# Altium PCB Arduino_DUE_V02b.PcbDoc (part 1 of 3)
Units mm, origin at the board's own origin, x right, y up, seen from the top; angles counter-clockwise.
Board outline 112.18 x 53.64 mm, 4 copper layers (Top Layer, Mid-Layer 1, Mid-Layer 2, Bottom Layer); 129 components, 175 nets, 644 pads, 366 vias.
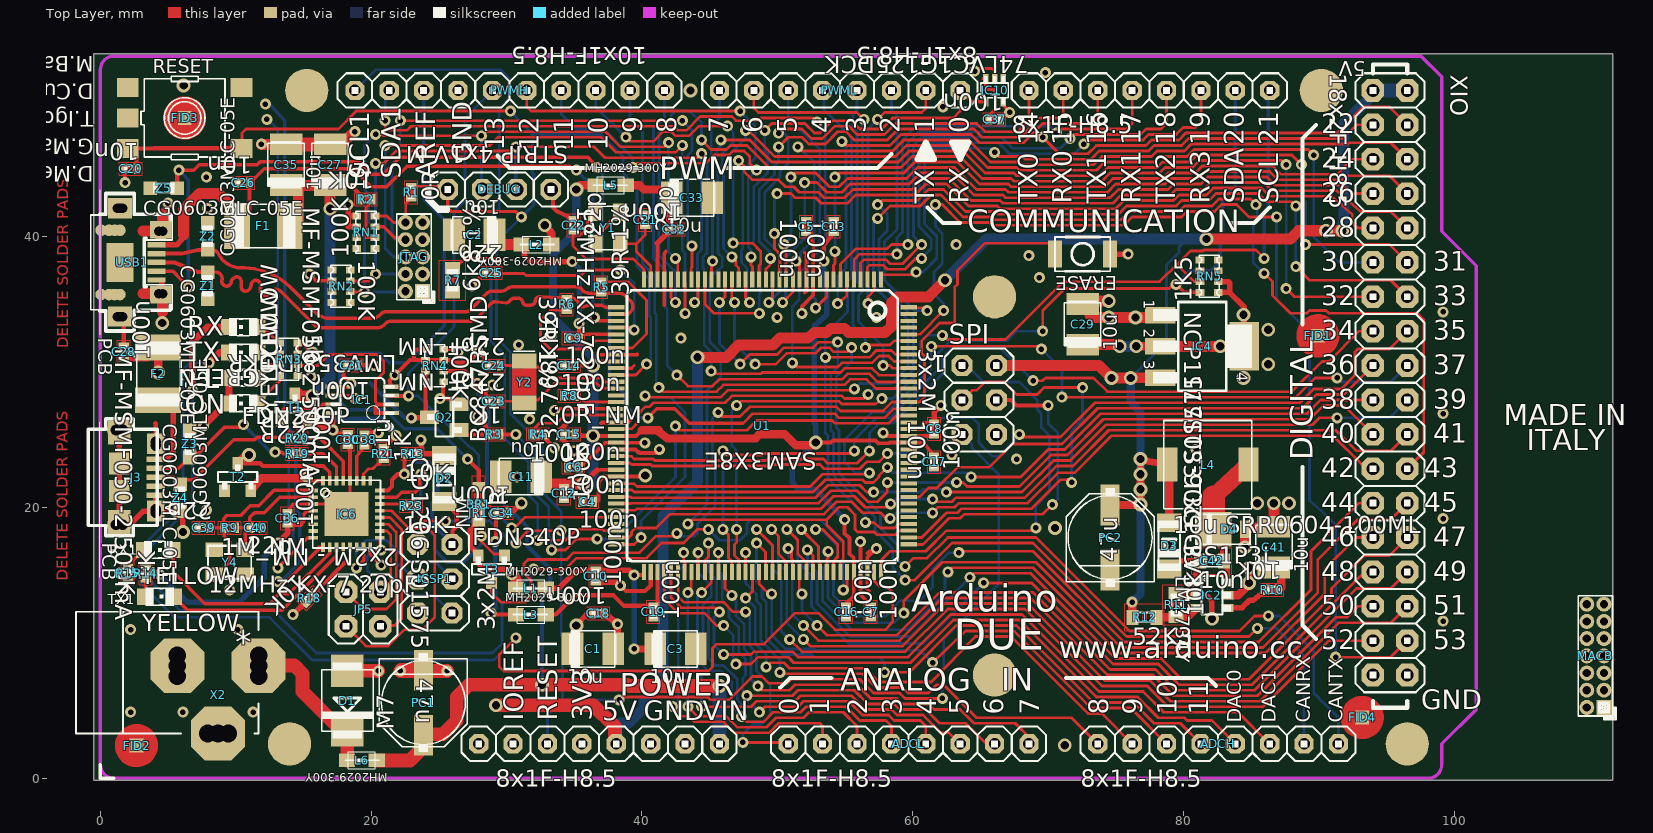
[diagram p0: Top Layer view]
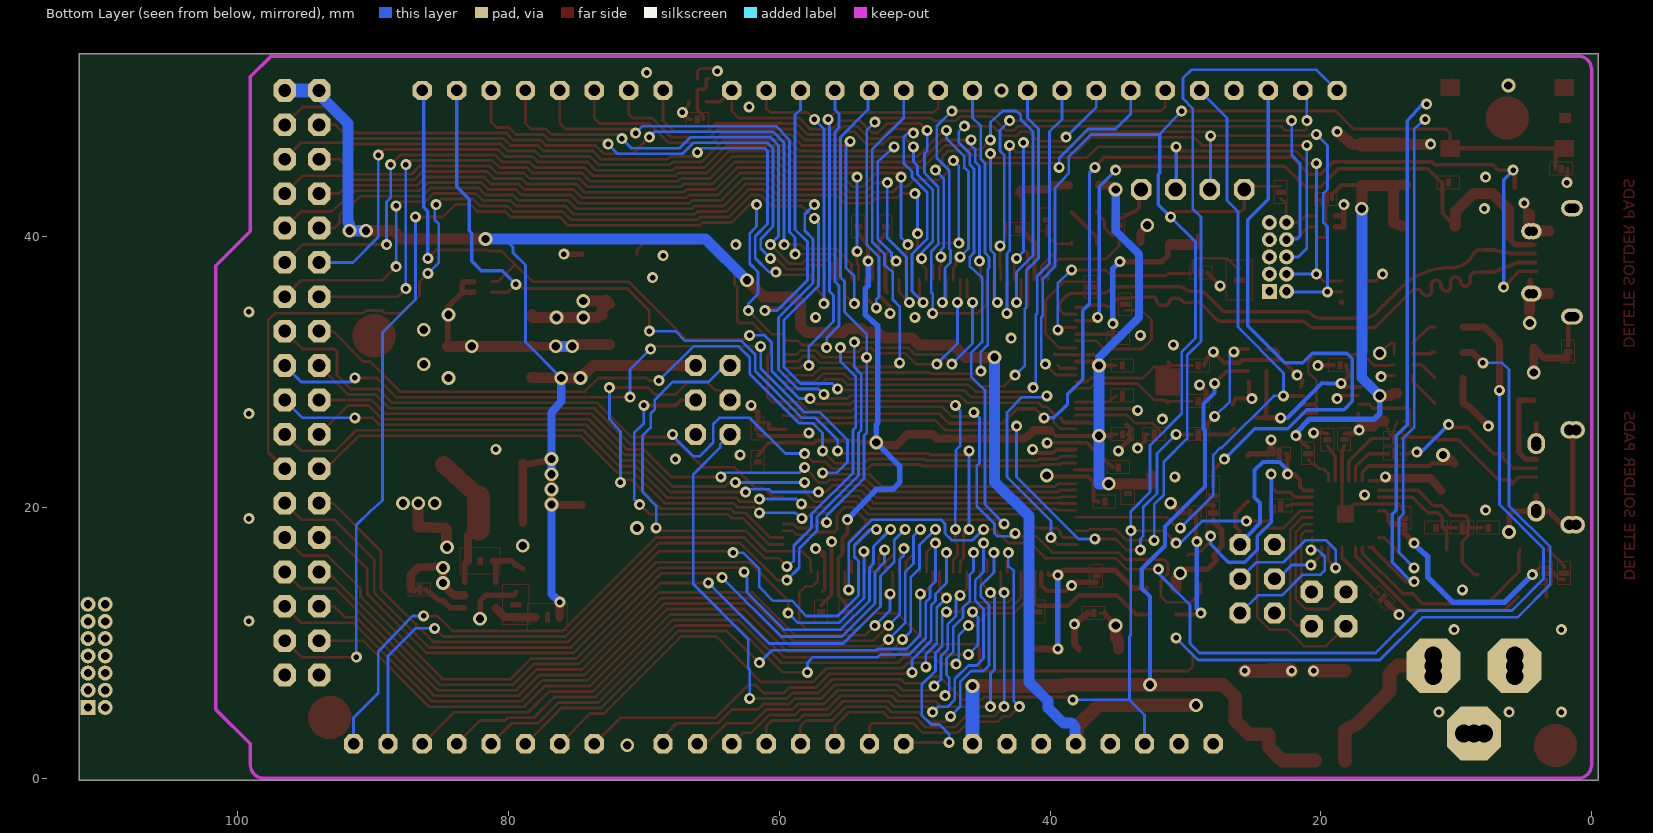
[diagram p1: Bottom Layer view, seen from below]
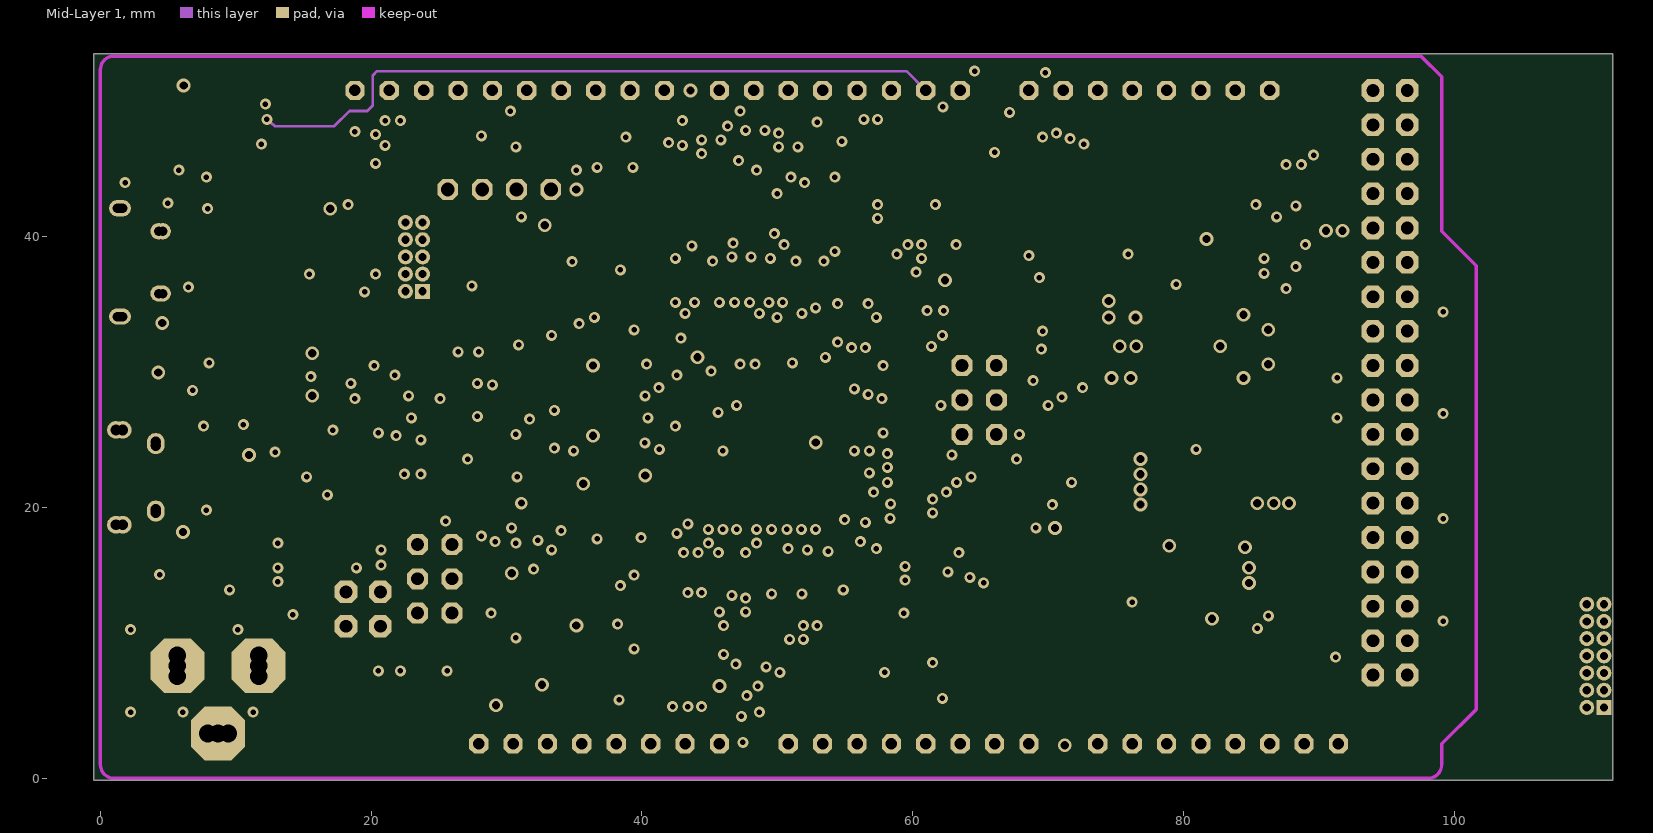
[diagram p2: Mid-Layer 1]
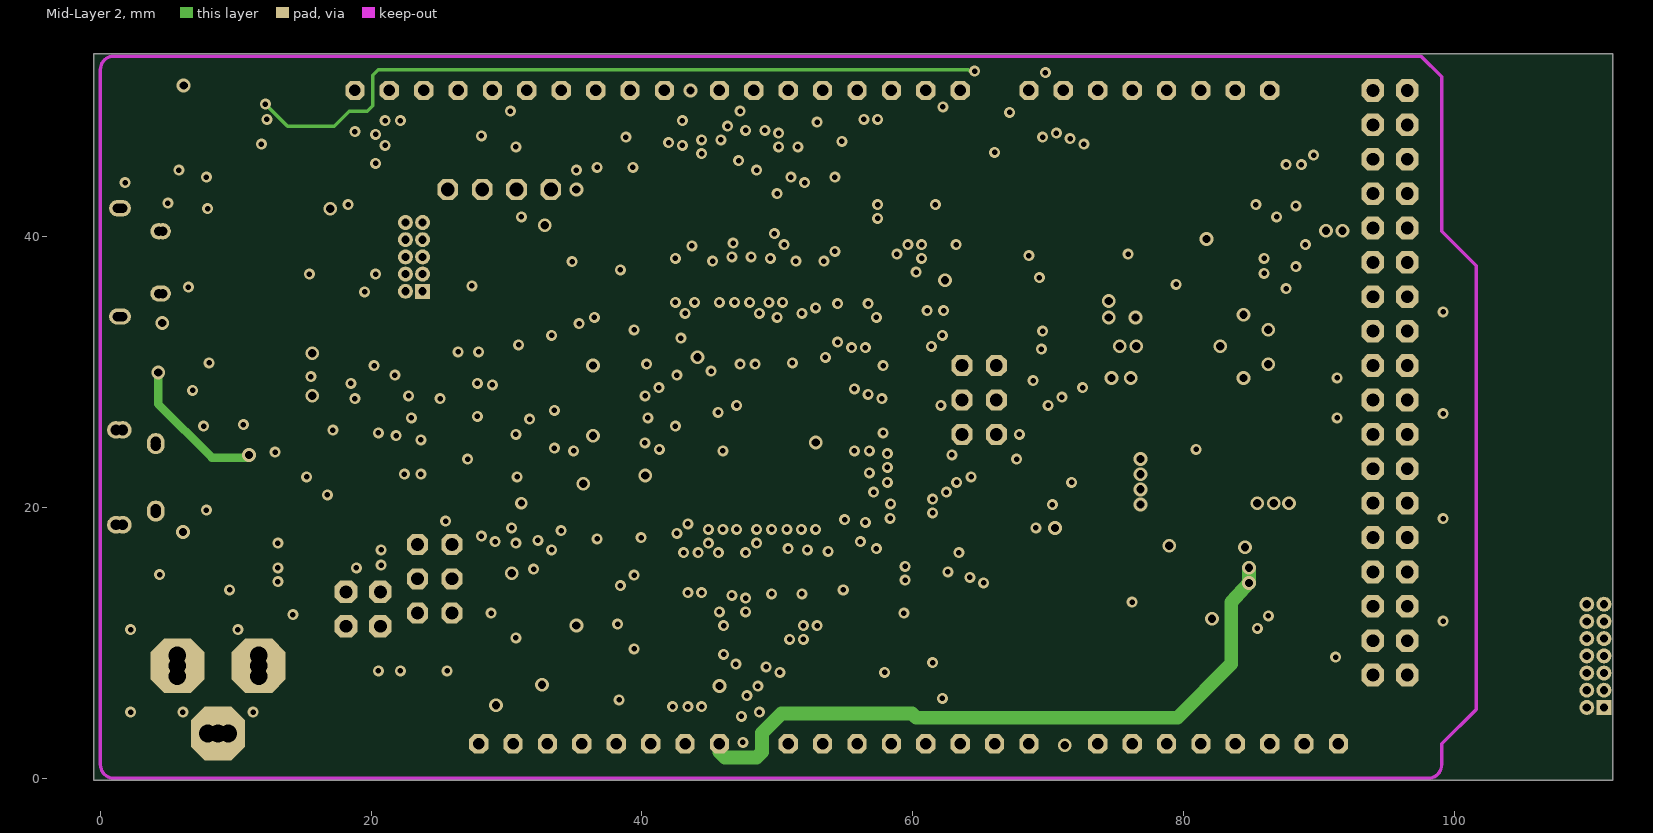
[diagram p3: Mid-Layer 2]

## Layer stack, top to bottom
Top Solder: solder mask 0.0102, Solder Resist, Dk 3.5
Top Layer: signal copper 0.0356
Dielectric1: core 0.32, FR-4, Dk 4.8
Mid-Layer 1: signal copper 0.0356
Dielectric2: prepreg 0.32, FR-4, Dk 4.8
Mid-Layer 2: signal copper 0.0356
Dielectric3: core 0.32, FR-4, Dk 4.8
Bottom Layer: signal copper 0.0356
Bottom Solder: solder mask 0.0102, Solder Resist, Dk 3.5

## Board outline
-0.479,-0.152 111.704,-0.152 111.704,53.492 -0.479,53.492

## Design rules (kind name [scope] priority, off if disabled: settings)
AssemblyTestPointUsage [All] p1 off:
AssemblyTestpoint [All] p1 off: testpointundercomponent=TRUE minsize=1.016 maxsize=2.54 preferedsize=1.524 minholesize=0 maxholesize=1.016 preferedholesize=0.813 testpointgrid=0.025 usegrid=TRUE gridtolerance=0 allowsidetop=TRUE allowsidebottom=TRUE
Clearance [All] p1: gap=0.102 ignorepadtopadclearanceinfootprint=FALSE except(0: Arc-Hole Track-Hole SMDPad-Hole THPad-Hole Via-Hole Fill-Hole Poly-Hole Region-Hole Text-Hole)
PolygonConnect [All] p1: connectstyle=Relief reliefconductorwidth=0.254 reliefentries=4 polygonreliefangle="90 Angle" airgapwidth=0.254
RoutingVias [All] p1: holewidth=0.711 width=1.27 viastyle="Through Hole" minholewidth=0.711 minwidth=1.27 maxholewidth=0.711 maxwidth=1.27
SolderMaskExpansion [All] p1: expansion=0.102
Width [All] p1: maxlimit=0.254 minlimit=0.254 preferedwidth=0.254
28 further rules are at their usual default settings.

## Components (designator, comment, footprint, x,y, rotation, side; value= is the part's Value field where it differs from the comment)
ADCH "8x1F-H8.5" 1X08 82.55,2.54 r0 top locked
ADCL "8x1F-H8.5" 1X08 59.69,2.54 r0 top locked
BR1 "NM" J0402 27.94,20.879 r270 top
C1 "10u" SMC_B 36.373,9.55 r0 top
C2 "10u" SMC_B 27.61,40.132 r180 top
C3 "10u" SMC_B 42.469,9.55 r0 top
C4 "100n" C0402 35.966,20.422 r0 top
C5 "100n" C0402 52.121,40.742 r270 top
C6 "100n" C0402 34.95,22.962 r0 top
C7 "100n" C0402 56.896,12.294 r90 top
C8 "100n" C0402 61.57,25.806 r270 top
C9 "100n" C0402 34.95,32.512 r0 top
C10 "100n" C0402 36.576,14.935 r90 top
C11 "10u" SMC_B 31.064,22.276 r180 top
C12 "100n" C0402 34.239,21.031 r90 top
C13 "100n" C0402 54.153,40.742 r270 top
C14 "100n" C0402 34.646,30.48 r0 top
C15 "100n" C0402 34.646,25.4 r0 top
C16 "100n" C0402 55.067,12.294 r90 top
C17 "100n" C0402 61.57,23.368 r90 top
C18 "100n" C0402 36.779,12.192 r180 top
C19 "100n" C0402 40.843,12.294 r90 top
C20 "10n" C0402 2.235,45.009 r180 top
C21 "22p" C0402 40.234,41.25 r90 top
C22 "22p" C0402 34.95,40.843 r90 top
C23 "22pF_NM" C0402 29.058,27.838 r180 top
C24 "22pF_NM" C0402 29.058,30.48 r180 top
C25 "22p" C0402 28.854,37.338 r180 top
C26 "10n" C0402 10.566,43.993 r180 top
C27 "10u" SMC_B 16.967,45.314 r90 top
C28 "100n" C0402 1.727,31.496 r90 top
C29 "10u" SMC_B 72.542,33.528 r90 top
C30 "100n" C0402 18.263,25.019 r90 top
C31 "100n" C0402 18.567,30.505 r180 top
C32 "100n" C0402 42.367,40.538 r180 top
C33 "10u" SMC_B 43.688,42.875 r0 top
C34 "100n" C0402 29.667,19.609 r180 top
C35 "10u" SMC_B 13.716,45.314 r90 top
C36 "100n" C0402 13.818,19.202 r90 top
C37 "100n" C0402 66.04,48.666 r180 top
C38 "1u" C0402 19.507,24.994 r90 top
C39 "22p" C0402 7.62,18.491 r180 top
C40 "22p" C0402 11.481,18.491 r0 top
C41 "10u" SMC_B 86.665,17.069 r90 top
C42 "10n" C0603-ROUND 82.093,16.053 r0 top
COMMUNICATION "8x1F-H8.5" 1X08 77.47,50.8 r0 top locked
D1 "M7" SMB 18.237,5.74 r90 top
D2 "CD1206-S01575" MINIMELF 25.4,22.149 r270 top
D3 "CD1206-S01575" MINIMELF 78.943,17.17 r90 top
D4 "SS1P3L" DO220AAL 82.906,18.39 r0 top
DEBUG "STRIP 4x1V M" 1X04 29.464,43.485 r180 top
ERASE "" SMD_157SW 72.542,38.71 r180 top
F1 "MF-MSMF050-2 500mA" L1812 12.04,40.792 r180 top
F2 "MF-MSMF050-2 500mA" L1812 4.267,29.87 r270 top
FID1 "*" FIDUCIA-MOUNT 89.916,32.68 r0 top
FID2 "*" FIDUCIA-MOUNT 2.667,2.413 r0 top
FID3 "*" FIDUCIA-MOUNT 6.223,48.768 r0 top
FID4 "*" FIDUCIA-MOUNT 93.193,4.496 r0 top
IC1 "LMV358IDGKR" MSOP08 19.355,27.94 r90 top
IC2 "LM2734Y" SOT23-6 82.093,13.513 r270 top
IC4 "NCP1117ST33T3G -3V3" SOT223 81.382,31.902 r270 top
IC6 "ATMEGA16U2-MU" MLF32 18.186,19.507 r0 top
IC10 "74LVC1G125DCK" SC70-5 66.04,50.8 r180 top
ICSP1 "3x2M" 2X03 24.689,14.732 r90 top
J3 "USB-MICRO B" CON2_USB_MICRO_B_AT 1.397,22.225 r270 top
JP5 "2x2M - NM" 2X02 19.406,12.497 r180 top
JR1 "0R" R0402 27.94,19.609 r90 top
JTAG "*" PINHEAD_2X05_127 23.165,38.506 r180 top
L "YELLOW" CHIP-LED0805 10.541,29.566 r90 top
L1 "MH2029-300Y" 0805 31.801,14.021 r0 top
L2 "MH2029-300Y" 0805 32.207,39.421 r180 top
L3 "MH2029-300Y" 0805 31.801,12.09 r0 top
L4 "10u SRR0604-100ML" SRR0604 81.788,23.165 r0 top
L5 "MH2029-300Y" 0805 37.694,43.79 r0 top
L6 "MH2029-300Y" 0805 19.304,1.321 r180 top
MACB "Eth" PINHEAD_2X07_127 110.414,9.042 r180 top
ON "GREEN" CHIP-LED0805 10.541,27.686 r90 top
PC1 "47u" PANASONIC_D 23.851,5.588 r270 top
PC2 "47u" PANASONIC_D 74.574,17.78 r90 top
POWER "8x1F-H8.5" 1X08 36.83,2.54 r0 top locked
PWMH "10x1F-H8.5" 1X10 30.226,50.8 r180 top locked
PWML "8x1F-H8.5" 1X08 54.61,50.8 r180 top locked
Q2 "BC847BSMD" SOT23 25.4,26.67 r90 top
R1 "0R" R0402 22.962,43.282 r90 top
R2 "10K" R0402 19.609,42.774 r180 top
R3 "1K" R0402 29.058,25.4 r180 top
R4 "100K" R0402 32.309,25.4 r0 top
R5 "39R 1%" R0402 36.982,36.271 r90 top
R6 "39R 1%" R0402 34.442,35.001 r270 top
R7 "6k8 1%" R0603-ROUND 26.01,36.779 r90 top
R8 "0R_NM" R0402 34.646,28.245 r0 top
R9 "1M_NM" R0402 9.55,18.491 r0 top
R10 "10k" R0402 86.563,13.919 r180 top
R11 "10K" R0603-ROUND 79.451,12.802 r90 top
R12 "52K3" R0603-ROUND 77.114,11.887 r0 top
R13 "10K" R0402 23.063,23.978 r0 top
R14 "1K" R0402 3.353,15.138 r270 top
R15 "1K" R0402 2.032,15.138 r90 top
R18 "10K" R0402 15.443,13.31 r225 top
R19 "22R" R0402 14.529,23.978 r180 top
R20 "22R" R0402 14.529,25.095 r180 top
R21 "1K" R0402 20.93,23.978 r90 top
R23 "10K" R0402 22.962,20.117 r0 top
RESET "TS42" TS42 6.223,48.768 r0 top
RN1 "100K" CAT16 19.609,40.335 r90 top
RN2 "100K" CAT16 17.78,36.347 r270 top
RN3 "1k" CAY16 13.894,30.937 r270 top
RN4 "100K" CAT16 24.689,30.48 r270 top
RN5 "1K5" CAT16 81.89,37.084 r90 top
RX "YELLOW" CHIP-LED0805 10.541,33.325 r90 top
RX1 "YELLOW" CHIP-LED0805 4.267,16.866 r270 top
SPI "3x2M" 2X03 64.897,27.94 r270 top locked
T1 "FDN340P" SOT-23 14.376,27.407 r180 top
T2 "FDN340P" SOT-23 10.16,22.25 r180 top
T3 "FDN340P" SOT-23 28.854,15.443 r0 top
TX "YELLOW" CHIP-LED0805 10.541,31.445 r90 top
TX1 "YELLOW" CHIP-LED0805 4.369,13.411 r270 top
U1 "SAM3X8E" LQFP144 48.895,26.035 r180 top
USB1 "MICRO-USB-AB1" MCR-AB1-S-RA-SMT 1.448,38.1 r270 top
X2 "*" POWERSUPPLY_DC-21MM 5.334,8.382 r90 top
XIO "18x2F-H8.5" 2X18 95.25,29.21 r270 top locked
Y1 "12MHz KX-7 20pF" CRYSTAL-3.2-2.5 37.465,40.64 r270 top
Y2 "32.768Khz" RESONATOR_EPSON_FC_145 31.293,29.261 r90 top
Y4 "12MHz KX-7 20pF" CRYSTAL-3.2-2.5 9.55,15.951 r0 top
Z1 "CG0603MLC-05E" CT/CN0603 7.925,36.373 r270 top
Z2 "CG0603MLC-05E" CT/CN0603 7.925,40.03 r90 top
Z3 "CG0603MLC-05E" CT/CN0603 6.604,24.689 r270 top
Z4 "CG0603MLC-05E" CT/CN0603 5.893,20.726 r90 top
Z5 "CG0603MLC-05E" CT/CN0603 4.674,43.586 r0 top

## Footprints (in the part's own frame and the unit in brackets; to place one, negate y for a bottom-side part, rotate by r counter-clockwise, add the part's x,y. Pads: shape width x height; smd on the part's side, far side on the other; paste and mask are expansions set on the pad)
1X04 [mil]
  oct 60x60 hole 40: 1(-150,0) 2(-50,0) 3(50,0) 4(150,0)
  silkscreen extent -200,-50 200,50
1X08 [mil]
  oct 56x56 hole 33.46: 1(-350,0) 2(-250,0) 3(-150,0) 4(-50,0) 5(50,0) 6(150,0) 7(250,0) 8(350,0)
  silkscreen extent -400,-50 400,50
1X10 [mil]
  oct 56x56 hole 33.46: 1(-450,0) 2(-350,0) 3(-250,0) 4(-150,0) 5(-50,0) 6(50,0) 7(150,0) 8(250,0) 9(350,0) 10(450,0)
  silkscreen extent -500,-50 500,50
2X02 [mil]
  oct 66x66 hole 37.4: 1(-50,-50) 2(-50,50) 3(50,-50) 4(50,50)
  silkscreen extent -100,-100 100,100
2X03 [mm]
  oct 1.55x1.55 hole 0.95: 1(-2.54,-1.27) 2(-2.54,1.27) 3(0,-1.27) 4(0,1.27) 5(2.54,-1.27) 6(2.54,1.27)
  silkscreen extent -3.81,-2.54 3.81,2.54
2X18 [mil]
  oct 66x66 hole 37.4: 1(-850,-50) 2(-850,50) 3(-750,-50) 4(-750,50) 5(-650,-50) 6(-650,50) 7(-550,-50) 8(-550,50) 9(-450,-50) 10(-450,50) 11(-350,-50) 12(-350,50) 13(-250,-50) 14(-250,50) 15(-150,-50) 16(-150,50) 17(-50,-50) 18(-50,50) 19(50,-50) 20(50,50) 21(150,-50) 22(150,50) 23(250,-50) 24(250,50) 25(350,-50) 26(350,50) 27(450,-50) 28(450,50) 29(550,-50) 30(550,50) 31(650,-50) 32(650,50) 33(750,-50) 34(750,50) 35(850,-50) 36(850,50)
  silkscreen extent -900,-100 900,100
0805 [mm]
  rect 1.2x1 smd: 1(-1.1,0) 2(1.1,0)
  silkscreen extent -1.3,-0.63 1.2,0.63
C0402 [mil]
  rect 20x30 smd: 1(-17.5,0) 2(17.5,0)
  Top Layer region: -7.87,-11.81 7.87,-11.81 7.87,11.81 -7.87,11.81
  Top Layer lines w2: -32.99,-19.02 -32.99,19.02 32.99,19.02 32.99,-19.02 -32.99,-19.02
  silkscreen extent -20,-10 20,10
C0603-ROUND [mm]
  rect 0.898x1.1 smd: 1(-0.889,0) 2(0.889,0)
  Top Layer region: -0.2,-0.3 0.2,-0.3 0.2,0.3 -0.2,0.3
  Top Layer lines w0.051: -1.473,-0.983 -1.473,0.983 1.473,0.983 1.473,-0.983 -1.473,-0.983
  silkscreen extent -0.84,-0.47 0.83,0.48
CAT16 [mm]
  rect 0.5x0.65 smd: 1(-1.2,-0.675) 2(-0.4,-0.675) 3(0.4,-0.675) 4(1.2,-0.675) 5(1.2,0.675) 6(0.4,0.675) 7(-0.4,0.675) 8(-1.2,0.675)
  silkscreen extent -1.55,-0.75 1.55,0.75
CAY16 [mm]
  rect 0.5x0.65 smd: 1(-1.2,-0.675) 2(-0.4,-0.675) 3(0.4,-0.675) 4(1.2,-0.675) 5(1.2,0.675) 6(0.4,0.675) 7(-0.4,0.675) 8(-1.2,0.675)
  silkscreen extent -1.55,-0.75 1.55,0.75
CHIP-LED0805 [mm]
  rect 1.2x1.2 smd: A(0,-1.05) C(0,1.05)
  silkscreen extent -0.68,-1.05 0.68,1.05
CON2_USB_MICRO_B_AT [mil]
  rect 16x53 smd: P1(-52,106) P2(-26,106) P3(0,106) P4(26,106) P5(52,106)
  round 51.5 hole 31.5: P$1(-103,106) P$2(-93,106) P$3(-138,-10) P$4(-138,10) P$5(138,10) P$6(138,-10) P$7(93,106) P$8(103,106)
  rect 70x65 smd: S1(-130,0) S2(130,0)
  rect 60x50 smd: S3(-98,106) S4(98,106)
  rect 64x60 smd: S5(-40,0) S6(40,0)
  silkscreen extent -170,-90 290,110
CRYSTAL-3.2-2.5 [mm]
  rect 1.3x1.05 smd: 1(-1.15,-0.925) 2(1.15,-0.925) 3(1.15,0.925) 4(-1.15,0.925)
  silkscreen extent -1.6,-1.25 1.6,1.25
CT/CN0603 [mm]
  rect 1x1 smd: 1(-1,0) 2(1,0)
  silkscreen extent -0.75,-0.35 0.75,0.35
DO220AAL [mil]
  rect 105x100 smd: P$1(-27.56,0)
  rect 30x50 smd: P$2(64.96,0)
  silkscreen extent -79,-43 79,43
FIDUCIA-MOUNT [mil]
  rect 40x40 smd: P$1(0,0)
  Top Layer circle w5: c0,0 r59.06
  Top Layer circle w86: c0,0 r19.68
J0402 [mm]
  rect 0.7x0.9 smd: 1(-0.65,0) 2(0.65,0) 3(1.95,0)
  Top Layer region: 1.1,-0.4 1.5,-0.4 1.5,0.4 1.1,0.4
  Top Layer region: -0.2,-0.4 0.2,-0.4 0.2,0.4 -0.2,0.4
  Top Layer lines w0.051: 2.773,-0.483 -1.473,-0.483 -1.473,0.483 2.773,0.483 2.773,-0.483
  silkscreen extent 0.72,-0.3 1.83,0.29
L1812 [mm]
  rect 1.9x3.4 smd: 1(-1.95,0) 2(1.95,0)
  silkscreen extent -2.39,-1.65 2.4,1.65
LQFP144 [mm]
  rect 0.3x1.2 smd: 1(-8.75,-10.8) 2(-8.25,-10.8) 3(-7.75,-10.8) 4(-7.25,-10.8) 5(-6.75,-10.8) 6(-6.25,-10.8) 7(-5.75,-10.8) 8(-5.25,-10.8) 9(-4.75,-10.8) 10(-4.25,-10.8) 11(-3.75,-10.8) 12(-3.25,-10.8) 13(-2.75,-10.8) 14(-2.25,-10.8) 15(-1.75,-10.8) 16(-1.25,-10.8) 17(-0.75,-10.8) 18(-0.25,-10.8) 19(0.25,-10.8) 20(0.75,-10.8) 21(1.25,-10.8) 22(1.75,-10.8) 23(2.25,-10.8) 24(2.75,-10.8) 25(3.25,-10.8) 26(3.75,-10.8) 27(4.25,-10.8) 28(4.75,-10.8) 29(5.25,-10.8) 30(5.75,-10.8) 31(6.25,-10.8) 32(6.75,-10.8) 33(7.25,-10.8) 34(7.75,-10.8) 35(8.25,-10.8) 36(8.75,-10.8) 73(8.75,10.8) 74(8.25,10.8) 75(7.75,10.8) 76(7.25,10.8) 77(6.75,10.8) 78(6.25,10.8) 79(5.75,10.8) 80(5.25,10.8) 81(4.75,10.8) 82(4.25,10.8) 83(3.75,10.8) 84(3.25,10.8) 85(2.75,10.8) 86(2.25,10.8) 87(1.75,10.8) 88(1.25,10.8) 89(0.75,10.8) 90(0.25,10.8) 91(-0.25,10.8) 92(-0.75,10.8) 93(-1.25,10.8) 94(-1.75,10.8) 95(-2.25,10.8) 96(-2.75,10.8) 97(-3.25,10.8) 98(-3.75,10.8) 99(-4.25,10.8) 100(-4.75,10.8) 101(-5.25,10.8) 102(-5.75,10.8) 103(-6.25,10.8) 104(-6.75,10.8) 105(-7.25,10.8) 106(-7.75,10.8) 107(-8.25,10.8) 108(-8.75,10.8)
  rect 1.2x0.3 smd: 37(10.8,-8.75) 38(10.8,-8.25) 39(10.8,-7.75) 40(10.8,-7.25) 41(10.8,-6.75) 42(10.8,-6.25) 43(10.8,-5.75) 44(10.8,-5.25) 45(10.8,-4.75) 46(10.8,-4.25) 47(10.8,-3.75) 48(10.8,-3.25) 49(10.8,-2.75) 50(10.8,-2.25) 51(10.8,-1.75) 52(10.8,-1.25) 53(10.8,-0.75) 54(10.8,-0.25) 55(10.8,0.25) 56(10.8,0.75) 57(10.8,1.25) 58(10.8,1.75) 59(10.8,2.25) 60(10.8,2.75) 61(10.8,3.25) 62(10.8,3.75) 63(10.8,4.25) 64(10.8,4.75) 65(10.8,5.25) 66(10.8,5.75) 67(10.8,6.25) 68(10.8,6.75) 69(10.8,7.25) 70(10.8,7.75) 71(10.8,8.25) 72(10.8,8.75) 109(-10.8,8.75) 110(-10.8,8.25) 111(-10.8,7.75) 112(-10.8,7.25) 113(-10.8,6.75) 114(-10.8,6.25) 115(-10.8,5.75) 116(-10.8,5.25) 117(-10.8,4.75) 118(-10.8,4.25) 119(-10.8,3.75) 120(-10.8,3.25) 121(-10.8,2.75) 122(-10.8,2.25) 123(-10.8,1.75) 124(-10.8,1.25) 125(-10.8,0.75) 126(-10.8,0.25) 127(-10.8,-0.25) 128(-10.8,-0.75) 129(-10.8,-1.25) 130(-10.8,-1.75) 131(-10.8,-2.25) 132(-10.8,-2.75) 133(-10.8,-3.25) 134(-10.8,-3.75) 135(-10.8,-4.25) 136(-10.8,-4.75) 137(-10.8,-5.25) 138(-10.8,-5.75) 139(-10.8,-6.25) 140(-10.8,-6.75) 141(-10.8,-7.25) 142(-10.8,-7.75) 143(-10.8,-8.25) 144(-10.8,-8.75)
  silkscreen extent -10,-10 10,10
MCR-AB1-S-RA-SMT [mm]
  rect 0.4x1.35 smd: 1(-1.3,2.7) 2(-0.65,2.7) 3(0,2.7) 4(0.65,2.7) 5(1.3,2.7)
  round 1.208 hole 0.7: P$1(-4,0.2) P$3(-4,0) P$4(-4,-0.2) P$5(4,0.2) P$6(4,0) P$7(4,-0.2) P$8(-2.3,3.15) P$9(-2.3,2.85) P$10(2.3,3.15) P$11(2.3,2.85)
  rect 2.9x2 smd: P$2(0,0)
  rect 1.3x1.6 smd: S1(-2.4,3) S2(2.4,3)
  rect 1.5x1.8 smd: S3(-4,0) S4(4,0)
  round 0.85 smd: ""(-2.375,-0.8) ""(-2.375,-0.4) ""(-2.375,0) ""(-2.375,-1.4) ""(2.375,-0.8) ""(2.375,-0.4) ""(2.375,0) ""(2.375,-1.4)
  Top Layer lines w0.075: -3.8,-0.525 -3.8,0.525
  silkscreen extent -5.35,-2.15 5.35,3.85
MINIMELF [mm]
  rect 1.4x1.8 smd: A(1.7,0) C(-1.7,0)
  silkscreen extent -1.85,-0.86 1.85,0.86
MLF32 [mm]
  rect 0.7x0.28 smd: 1(-2.45,1.75) 2(-2.45,1.25) 3(-2.45,0.75) 4(-2.45,0.25) 5(-2.45,-0.25) 6(-2.45,-0.75) 7(-2.45,-1.25) 8(-2.45,-1.75) 17(2.45,-1.75) 18(2.45,-1.25) 19(2.45,-0.75) 20(2.45,-0.25) 21(2.45,0.25) 22(2.45,0.75) 23(2.45,1.25) 24(2.45,1.75)
  rect 0.28x0.7 smd: 9(-1.75,-2.45) 10(-1.25,-2.45) 11(-0.75,-2.45) 12(-0.25,-2.45) 13(0.25,-2.45) 14(0.75,-2.45) 15(1.25,-2.45) 16(1.75,-2.45) 25(1.75,2.45) 26(1.25,2.45) 27(0.75,2.45) 28(0.25,2.45) 29(-0.25,2.45) 30(-0.75,2.45) 31(-1.25,2.45) 32(-1.75,2.45)
  rect 3.254x3.254 smd: 33(0,0)
  Top Layer region: -0.635,-0.635 0.635,-0.635 0.635,0.635 -0.635,0.635
  silkscreen extent -2.5,-2.5 2.5,2.5
MSOP08 [mm]
  rect 0.3x1.2 smd: 1(-0.976,-2.113) 2(-0.326,-2.113) 3(0.324,-2.113) 4(0.974,-2.113) 5(0.974,2.112) 6(0.324,2.112) 7(-0.326,2.112) 8(-0.976,2.112)
  silkscreen extent -1.63,-2.36 1.62,2.36
PANASONIC_D [mm]
  rect 3x1.4 smd: +(2.4,0) -(-2.4,0)
  silkscreen extent -3.65,-3.25 3.65,3.25
PINHEAD_2X05_127 [mm]
  rect 1.108x1.108 hole 0.6: 1(-0.635,2.54)
  round 1.108 hole 0.6: 2(0.635,2.54) 3(-0.635,1.27) 4(0.635,1.27) 5(-0.635,0) 6(0.635,0) 7(-0.635,-1.27) 8(0.635,-1.27) 9(-0.635,-2.54) 10(0.635,-2.54)
  silkscreen extent -1.52,-3.17 1.27,3.43
PINHEAD_2X07_127 [mm]
  rect 1.108x1.108 hole 0.6: 1(-0.635,3.81)
  round 1.108 hole 0.6: 2(0.635,3.81) 3(-0.635,2.54) 4(0.635,2.54) 5(-0.635,1.27) 6(0.635,1.27) 7(-0.635,0) 8(0.635,0) 9(-0.635,-1.27) 10(0.635,-1.27) 11(-0.635,-2.54) 12(0.635,-2.54) 13(-0.635,-3.81) 14(0.635,-3.81)
  silkscreen extent -1.52,-4.44 1.27,4.7
POWERSUPPLY_DC-21MM [mm]
  oct 4x4 hole 1.3: 1(-5.08,-3.353) 2(-0.076,-6.35) 3(-0.076,-0.356)
  round 1.95 hole 1.3: 4(-5.08,-4.115) 5(-5.08,-2.591) 6(-0.838,-0.356) 7(0.686,-0.356) 8(-0.838,-6.35) 9(0.686,-6.35)
  silkscreen extent -5.08,-6.35 3.91,7.14
R0402 [mil]
  rect 20x30 smd: 1(-17.5,0) 2(17.5,0)
  Top Layer region: -7.87,-15.75 7.87,-15.75 7.87,15.75 -7.87,15.75
  Top Layer lines w2: -32.99,19.02 -32.99,-19.02 32.99,-19.02 32.99,19.02 -32.99,19.02
  silkscreen extent -20,-10 20,10
R0603-ROUND [mm]
  rect 0.898x1.1 smd: 1(-0.889,0) 2(0.889,0)
  Top Layer region: -0.2,-0.4 0.2,-0.4 0.2,0.4 -0.2,0.4
  Top Layer lines w0.051: -1.473,0.983 -1.473,-0.983 1.473,-0.983 1.473,0.983 -1.473,0.983
  silkscreen extent -0.84,-0.43 0.84,0.43
RESONATOR_EPSON_FC_145 [mm]
  rect 1.1x1.8 smd: P$1(-1.55,0) P$2(1.55,0)
  Top Layer region: -1,-0.9 1,-0.9 1,0.9 -1,0.9
  Top Layer region: -1,-0.9 1,-0.9 1,0.9 -1,0.9
  Top Layer region: -1,-0.9 1,-0.9 1,0.9 -1,0.9
  silkscreen extent -2.29,-0.76 2.29,0.76
SC70-5 [mm]
  rect 0.4x0.7 smd: 1(-0.65,-0.85) 2(0,-0.85) 3(0.65,-0.85) 4(0.65,0.85) 5(-0.65,0.85)
  silkscreen extent -1,-1.05 1,1.05
SMB [mm]
  rect 2.4x2.4 smd: A(2.2,0) C(-2.2,0)
  silkscreen extent -2.79,-1.91 2.79,1.91
SMC_B [mm]
  rect 1.6x2.4 smd: +(-1.5,0) -(1.5,0)
  silkscreen extent -1.75,-1.35 1.75,1.35
SMD_157SW [mil]
  rect 40x78 smd: 1(-80,0) 2(80,0)
  silkscreen extent -80,-50 80,50
SOT23 [mm]
  rect 1x1.4 smd: 1(-0.95,-1.1) 2(0.95,-1.1) 3(0,1.1)
  silkscreen extent -1.42,-1.3 1.42,1.3
SOT23-6 [mm]
  rect 0.6x0.9 smd: 1(-0.95,-1.15) 2(0,-1.15) 3(0.95,-1.15) 4(0.95,1.15) 5(0,1.15) 6(-0.95,1.15)
  silkscreen extent -1.42,-1.4 1.42,1.4
SOT223 [mil]
  rect 48x88 smd: 1(-91,-122) 2(0,-122) 3(91,-122)
  rect 141.73x86.61 smd: 4(0,122.01)
  silkscreen extent -129,-144 129,144
SOT-23 [mil]
  rect 31x35 smd: 1(1,-40) 2(-37,40) 3(39,40)
  silkscreen extent -56,-37 58,37
SRR0604 [mm]
  rect 1.5x2.5 smd: P$1(3,0) P$2(-3,0)
  silkscreen extent -3.25,-3.25 3.25,3.25
TS42 [mm]
  rect 1.6x1.4 smd: 1(-4.2,2.25) 2(4.2,2.25) 3(-4.2,-2.25) 4(4.2,-2.25) 5(-4.2,0)
  Top Layer region: 3.48,1.626 4.928,1.626 4.928,2.87 3.48,2.87
  Top Layer region: 3.48,-2.87 4.928,-2.87 4.928,-1.626 3.48,-1.626
  Top Layer region: -4.928,-2.87 -3.48,-2.87 -3.48,-1.626 -4.928,-1.626
  Top Layer region: -4.928,1.626 -3.48,1.626 -3.48,2.87 -4.928,2.87
  Top Layer region: -4.699,-0.381 -3.81,-0.381 -3.81,0.381 -4.699,0.381
  silkscreen extent -3.23,-3.09 2.98,3.09

## Part data
ADCH ADCL COMMUNICATION POWER PWML: library part PINHD-1X8
BR1: library part J0402
C1 C2 C3 C11 C27 C29 C33 C35 C41: library part CPOL-EUSMCB
C4 C5 C6 C7 C8 C9 C10 C12 C13 C14 C15 C16 C17 C18 C19 C20 C21 C22 C23 C24 C25 C26 C28 C30 C31 C32 C34 C36 C37 C38 C39 C40: library part C-EUC0402
C42: library part C-EUC0603
D1: library part DIODE-SMB
D2 D3: library part DIODE-MINIMELF
DEBUG: library part PINHD-1X4
ERASE: library part MYSMD_PB157
F1 F2: library part L-EUL1812
FID1 FID2 FID3 FID4: library part FIDUCIALMOUNT
IC1: library part LMV358MMX
IC2: library part LM2736Y
IC4: library part MC33269ST-3.3T3
ICSP1 SPI: library part PINHD-2X3
J3: library part MYCON2_USB-MINI-B
JP5: library part PINHD-2X2
JR1 R1 R2 R3 R4 R5 R6 R8 R9 R10 R13 R14 R15 R18 R19 R20 R21 R23: library part R-EU_R0402
JTAG: library part PINHEAD_PINHD-2X5PASSO127
L ON RX RX1 TX TX1: library part LEDCHIP-LED0805
L1 L2 L3 L5 L6: library part WE-CBF_0805
L4: library part L-USSRR0604
MACB: library part PINHEAD_PINHD-2X7PASSO127
PC1 PC2: library part CPOL-EUD
PWMH: library part PINHD-1X10
R7: library part R-EU_R0603
R11 R12: library part R-EU_0603-RND
RN1 RN2 RN4 RN5: library part 4R-NCAT16
RN3: library part 4R-NCAY16
T1 T2 T3: library part PMOSSOT23
U1: library part ATSAM3X/AAU
USB1: library part MICRO_USB
X2: library part POWERSUPPLY_DC21MMX
XIO: library part PINHD-2X18
Y1 Y4: library part CRYSTAL-3.2-2.5
Y2: library part RESONATOR_EPSON_FC_145
Z1 Z2 Z3 Z4 Z5: library part VARISTORCN0603

## Free pads (board coordinates)
  round 3.2 smd: ""(13.97,2.54) ""(15.24,50.8) ""(66.04,7.62) ""(66.04,35.56) ""(90.17,50.8) ""(96.52,2.54)

## Via types
v1: diameter 0.813, hole 0.406, Top Layer to Bottom Layer, 313 vias
v2: diameter 1.016, hole 0.61, Top Layer to Bottom Layer, 52 vias
v3: diameter 0.914, hole 0.508, Top Layer to Bottom Layer, 1 vias

## Nets (pads, with @x,y where several pads share a name; then routed paths per layer and width w, separated by ;. In a path a pad name is that pad's centre, name@x,y a point inside that pad or via, vN(x,y) a via of type N, cw(c..) or ccw(c..) an arc to the next point about the centre after c; other vN are vias at no path point)
8PB4: IC6.18 JP5.1 | length 5.4
  Top Layer w0.203: IC6.18@20.636,18.257 21.164,18.257 21.438,17.983 21.438,14.529 JP5.1@20.676,13.767
8PB5: IC6.19 JP5.3 | length 11
  Top Layer w0.203: JP5.3@18.136,13.767 19.406,12.497 21.133,12.497 21.844,13.208 21.844,18.186 21.273,18.757 IC6.19@20.636,18.757
8PB6: IC6.20 JP5.2 | length 10.4
  Top Layer w0.203: IC6.20@20.636,19.257 21.383,19.257 22.25,18.39 22.25,11.786 21.742,11.278 20.726,11.278 JP5.2@20.676,11.227
8PB7: IC6.21 JP5.4 | length 18.9
  Top Layer w0.203: JP5.4@18.136,11.227 19.609,9.754 21.234,9.754 22.454,10.973 23.774,10.973 24.689,11.887 24.689,17.983 24.181,18.491 22.758,18.491 21.492,19.757 IC6.21@20.636,19.757
16U2-TX: IC6.9 IC10.2 | length 100
  Top Layer w0.203: v1(64.567,52.222) 64.77,52.426 65.837,52.426 66.04,52.222 IC10.2@66.04,51.65
  Top Layer w0.254: v1(13.106,14.529) 13.716,14.529 16.143,16.956 16.143,17.057 IC6.9@16.436,17.057
  Mid-Layer 2 w0.254: v1(12.192,49.784) 13.818,48.158 17.272,48.158 18.39,49.276 19.71,49.276 20.117,49.682 20.117,51.918 20.523,52.324 64.11,52.324 64.211,52.222 v1(64.567,52.222)
  Bottom Layer w0.254: v1(12.192,49.784) 12.497,49.784 13.614,48.565 13.614,26.111 14.427,25.298 14.427,19.812 14.732,19.507 14.732,15.951 13.31,14.529 v1(13.106,14.529)
+3V3: BR1.3 C1.+ C4.2 C5.2 C6.2 C7.2 C8.2 C18.2 C20.2 C29.+ C37.1 ERASE.1 IC1.6 IC4.2 IC4.4 IC10.5 JR1.1 JTAG.1 L1.1 L2.1 POWER.2 POWER.4 R4.2 RN1.5 RN1.6 RN2.2 RN2.3 RN3.5 RN3.7 RN3.8 RN5.1 RN5.2 T3.2 U1.11 U1.52 U1.57 U1.62 U1.105 U1.125 | length 79.3
  Top Layer w0.008: RN5.2@82.564,36.684 RN5.2@82.571,36.678
  Top Layer w0.203: RN3.5@14.569,29.737 15.513,29.737 v1(15.545,29.667) ; RN3.7@14.569,31.337 RN3.8@14.569,32.137 14.802,32.137 v2(15.646,31.394) ; RN2.2@17.086,36.728 RN2.2@17.105,36.747 ; IC1.6@17.243,28.264 18.573,28.264 v1(18.796,28.042) ; R4.2@32.715,25.387 R4.2@32.753,25.4 ; R4.2@32.944,25.4 32.817,25.425 R4.2@32.715,25.4 ; L2.1@33.307,39.421 33.358,39.454 L2.1@33.325,39.624 ; C1.+@34.873,9.55 C1.+@34.95,9.55 ; 35.966,12.192 C18.2@36.335,12.192 ; U1.57@37.998,24.79 U1.57@38.095,24.785 U1.57@38.189,24.778 ; U1.62@38.011,22.289 38.054,22.276 U1.62@38.095,22.285 ; v2@40.167,22.285 v2(40.234,22.352) ; U1.11@52.642,36.881 U1.11@52.645,36.835 ; C8.2@61.57,25.362 C8.2@61.57,25.4 ; R4.2@32.715,25.4 cw(c32.734,25.367) R4.2@32.753,25.4 ; R4.2@32.715,25.4 R4.2@32.753,25.4
  Top Layer w0.254: v1(15.443,37.236) 15.951,36.728 RN2.2@17.069,36.728 ; RN2.2@17.086,36.728 RN2.2@17.069,36.728 ; RN2.3@17.105,35.947 17.037,35.947 17.069,36.119 RN2.2@17.069,36.728 ; C37.1@66.485,48.666 66.65,48.666 v1(67.158,49.174) 66.69,49.723 IC10.5@66.69,49.95
  Top Layer w0.279: v1(33.528,27.178) 33.604,27.178 33.711,27.285 U1.52@38.095,27.285 ; 36.678,24.181 37.275,24.778 U1.57@37.998,24.79 ; 37.173,22.289 U1.62@38.011,22.289 ; U1.62@38.095,22.285 v2@40.167,22.285 ; U1.57@38.189,24.778 v1(40.221,24.778) ; v1(51.816,34.341) 51.816,34.849 52.642,35.674 52.642,36.805 52.645,36.795 U1.11@52.645,36.835 ; U1.11@52.642,36.881 52.642,39.497 ; v1(56.134,17.475) 56.145,17.232 U1.105@56.145,15.235 56.145,13.553 56.896,12.802 C7.2@56.896,12.738 ; v1(57.81,25.502) 58.027,25.285 U1.125@59.695,25.285 61.481,25.285 C8.2@61.57,25.4
  Top Layer w0.305: C20.2@1.791,45.009 v1(1.829,43.993) ; BR1.3@27.94,18.929 JR1.1@27.94,19.164 ; R4.2@32.944,25.4 32.944,24.968 v1(33.528,24.384) ; C6.2@35.395,22.962 35.395,23 36.678,24.181 ; C4.2@36.411,20.422 36.779,20.523 36.779,21.895 37.173,22.289 ; C5.2@52.121,40.297 52.642,39.497
  Top Layer w0.406: v1(18.288,42.367) 18.288,41.554 ; RN1.6@18.934,40.735 18.288,40.735 18.288,41.554 ; RN1.5@18.934,41.535 18.324,41.554 18.288,41.554 ; BR1.3@27.94,18.929 27.33,18.319 27.33,17.17 27.711,16.688 T3.2@27.915,16.459 27.711,16.078 28.346,15.443 30.074,15.443 v2(30.378,15.138) ; L1.1@30.64,14.082 L1.1@30.701,14.021 ; v2(35.154,11.278) 35.966,12.192 ; ERASE.1@74.574,38.71 v1(75.895,38.71) ; RN5.1@82.564,35.884 83.23,35.884 ; RN5.2@82.564,36.678 RN5.2@82.564,36.684 ; RN5.2@82.571,36.678 83.312,36.678 83.414,36.576 83.414,36.068 83.23,35.884 ; IC4.4@84.481,31.902 84.481,34.798 83.394,35.884 83.23,35.884
  Top Layer w0.61: v2(32.817,40.843) 33.325,40.234 L2.1@33.325,39.624 ; v2(76.505,31.902) IC4.2@78.283,31.902
  Top Layer w0.813: v2(30.378,15.138) 30.683,14.732 30.683,14.021 L1.1@30.701,14.021 ; C1.+@34.95,9.55 34.95,10.16 35.154,10.363 v2(35.154,11.278) ; C29.+@72.542,32.028 75.16,32.028 v2(75.286,31.902) ; IC4.2@78.283,31.902 IC4.4@84.481,31.902
  Bottom Layer w0.813: v2(75.286,31.902) v2(76.505,31.902)
  other v2: 84.43,29.566 86.258,30.582 82.702,31.902 86.258,33.122 84.43,34.239
+5V: C30.2 C36.1 D2.C D3.A IC1.8 IC4.3 IC6.4 IC6.32 ICSP1.2 L4.P$2 PC2.+ POWER.5 R12.1 R13.2 R14.1 R15.1 SPI.2 T1.2 T2.2 XIO.1 XIO.2 | length 199.3
  Top Layer w0.254: R15.1@2.032,14.694 2.4,14.694 2.642,14.935 2.642,15.037 3.188,15.583 R14.1@3.353,15.583 3.823,15.583 v1(4.369,15.037) ; 14.793,18.756 15.037,18.999 15.037,19.507 15.287,19.757 IC6.4@15.736,19.757 ; v1(15.24,22.25) 15.228,21.957 IC6.32@16.436,21.957 ; v1(17.17,25.705) 17.243,25.777 IC1.8@17.243,26.964
  Top Layer w0.305: v1(17.17,25.705) 17.412,25.464 C30.2@18.263,25.464
  Top Layer w0.406: v1(13.106,17.374) 13.828,18.095 C36.1@13.818,18.758 14.793,18.756 ; v1@15.138,22.149 v1(15.24,22.25) ; v1(23.673,24.994) 23.713,24.953 23.713,24.374 23.52,24.181 R13.2@23.508,23.978 D2.C@25.271,23.978 ; D2.C@25.298,23.978 D2.C@25.271,23.978 ; D2.C@25.4,23.849 D2.C@25.271,23.978
  Top Layer w0.508: v2(76.81,22.454) 76.81,23.266 77.013,23.47 L4.P$2@78.788,23.165
  Top Layer w0.61: T2.2@11.1,21.234 11.887,22.149 v1@15.138,22.149 ; PC2.+@74.574,20.18 76.771,20.18 v2(76.81,20.218) v2(76.81,21.336) v2(76.81,22.454) ; v1(76.2,13.005) R12.1@76.225,11.887 ; L4.P$2@78.788,23.165 78.943,23.314 D3.A@78.943,18.87
  Top Layer w0.813: T1.2@15.316,26.391 15.773,26.391 16.154,26.01 16.866,26.01 v1(17.17,25.705) ; POWER.5@37.998,2.642 POWER.5@38.1,2.54 ; v2(44.094,31.09) 46.228,31.09 47.142,32.004 49.682,32.004 50.19,32.512 52.273,32.512 52.73,32.918 53.645,32.918 53.95,33.223 54.966,33.223 55.27,32.918 57.963,32.918 58.42,33.376 58.42,35.103 58.877,35.56 61.163,35.56 v2(62.382,36.779) ; SPI.2@66.167,30.48 73.762,30.48 v2(74.676,29.566) 76.124,29.566 IC4.3@78.283,29.591 78.054,29.591 v2(76.098,29.566) ; v2(81.686,39.827) 87.884,39.827 88.494,40.437 v2(90.526,40.437) v2(91.745,40.437)
  Top Layer w1.016: v2(29.21,5.385) 36.424,5.385 37.998,3.81 POWER.5@37.998,2.642
  Bottom Layer w0.203: v2(76.098,29.566) 78.74,32.207 78.74,37.897 79.654,38.811 79.654,39.218 80.162,39.726 80.162,39.827
  Bottom Layer w0.406: v1(4.369,15.037) 6.401,13.005 10.262,13.005 12.09,14.834 12.09,16.358 13.106,17.272 v1(13.106,17.374)
  Bottom Layer w0.61: POWER.5@38.1,2.54 POWER.5@38.151,2.438 ; v2(76.098,29.566) 76.098,27.838 76.81,27.026 v2(76.81,22.454) ; v1(76.2,13.005) 76.81,13.614 v2(76.81,20.218)
  Bottom Layer w0.813: POWER.5@38.1,2.54 38.151,3.404 ; POWER.5@38.151,2.438 38.151,3.404 ; v2(44.094,31.09) 44.094,21.895 41.554,19.355 41.554,7.112 40.132,5.69 40.132,5.182 39.014,4.064 38.405,4.064 38.151,3.759 38.151,3.404 ; v2@62.586,36.982 v2(62.382,36.779) 65.43,39.827 80.162,39.827 v2(81.686,39.827) ; v2(90.526,40.437) v2(91.745,40.437) 91.745,40.945 91.846,41.046 91.846,48.362 93.777,50.292 XIO.1@93.98,50.8
  Bottom Layer w1.016: XIO.1@93.98,50.8 XIO.2@96.52,50.8
  other v2: 76.81,23.571
AD0: ADCL.1 U1.78 | length 22.3
  Top Layer w0.203: U1.78@42.645,15.235 42.672,15.037 42.672,13.41 43.077,13.005 46.025,13.005 46.736,12.294 v1(47.65,12.294) ; v1(47.447,2.642) 50.8,2.642 ADCL.1@50.8,2.54
  Bottom Layer w0.203: v1(47.447,2.642) 47.447,3.251 48.158,3.962 48.768,3.962 49.479,4.674 49.479,6.909 48.463,7.925 48.463,9.246 47.955,9.754 47.955,11.989 v1(47.65,12.294)
AD1: ADCL.2 U1.79 | length 26.8
  Top Layer w0.203: v1(42.266,5.283) 42.977,4.572 43.485,4.572 43.891,4.166 46.025,4.166 46.838,3.353 49.378,3.353 50.089,4.064 53.137,4.064 53.34,3.861 ADCL.2@53.34,2.54 ; v1(43.078,16.662) 43.078,16.154 43.18,16.053 43.18,15.235 U1.79@43.145,15.235
  Bottom Layer w0.203: v1(42.266,5.283) 42.672,5.69 42.672,15.342 43.078,15.646 v1(43.078,16.662)
AD2: ADCL.3 U1.80 | length 25.4
  Top Layer w0.203: v1(43.383,5.283) 44.094,4.572 46.228,4.572 47.041,3.759 49.174,3.759 49.886,4.47 51.918,4.47 52.324,4.877 54.864,4.877 55.88,3.861 ADCL.3@55.88,2.54 ; v1(43.383,13.716) 43.637,13.919 U1.80@43.645,15.235
  Bottom Layer w0.203: v1(43.383,5.283) v1(43.383,13.716)
AD3: ADCL.4 U1.81 | length 29.5
  Top Layer w0.203: U1.81@44.145,15.235 44.145,16.612 v1(44.145,16.662) ; v1(47.346,4.572) 47.752,4.166 48.971,4.166 49.682,4.877 51.714,4.877 52.121,5.283 55.067,5.283 56.083,4.267 58.014,4.267 58.42,3.861 ADCL.4@58.42,2.54
  Bottom Layer w0.203: v1(44.145,16.662) 44.145,15.189 45.11,14.224 45.11,13.411 44.501,12.802 44.501,8.331 44.907,7.925 45.822,7.925 46.634,7.112 46.634,5.283 v1(47.346,4.572)
AD4: ADCL.5 U1.82 | length 32.4
  Top Layer w0.203: U1.82@44.645,15.235 44.645,16.095 44.907,16.358 v1(44.907,17.374) ; v1(48.666,4.877) 49.073,5.283 51.511,5.283 51.918,5.69 55.27,5.69 56.286,4.674 58.217,4.674 58.623,4.267 60.554,4.267 60.96,3.861 ADCL.5@60.96,2.54 ADCL.5@60.96,2.438
  Bottom Layer w0.203: v1(44.907,17.374) 44.907,15.24 45.517,14.63 45.517,13.106 44.907,12.497 44.907,8.839 45.415,8.331 46.025,8.331 47.041,7.315 47.041,5.791 47.549,5.283 48.26,5.283 v1(48.666,4.877)
AD5: ADCL.6 U1.83 | length 31.4
  Top Layer w0.203: v1(44.399,5.283) 48.057,5.283 48.463,5.69 51.308,5.69 51.714,6.096 55.474,6.096 56.49,5.08 58.42,5.08 58.826,4.674 60.757,4.674 62.078,3.353 62.687,3.353 ADCL.6@63.5,2.54 ; v1(44.399,13.716) 45.11,14.427 45.11,15.037 U1.83@45.145,15.235
  Bottom Layer w0.203: v1(44.399,5.283) 44.399,7.722 44.094,8.026 44.094,13.411 v1(44.399,13.716)
AD6: ADCL.7 U1.84 | length 33.1
  Top Layer w0.203: v1(45.644,16.662) 45.645,16.587 U1.84@45.645,15.235 ; v1(47.752,6.096) 51.105,6.096 51.511,6.502 55.677,6.502 56.693,5.486 58.623,5.486 59.03,5.08 60.96,5.08 61.976,4.064 63.906,4.064 65.43,2.54 ADCL.7@66.04,2.54
  Bottom Layer w0.203: v1(45.644,16.662) 45.644,15.316 45.923,15.037 45.923,13.106 46.431,12.598 46.431,11.887 47.142,11.176 47.142,9.347 47.65,8.839 47.65,7.62 47.447,7.417 47.447,6.401 v1(47.752,6.096)
AD7: ADCL.8 U1.85 | length 31.9
  Top Layer w0.203: U1.85@46.145,15.235 46.126,15.037 46.126,14.018 46.581,13.564 v1(46.634,13.513) ; v1(48.565,6.807) 48.87,6.502 50.902,6.502 51.308,6.909 55.88,6.909 56.896,5.893 58.826,5.893 59.233,5.486 61.163,5.486 61.57,5.08 63.5,5.08 64.516,4.064 67.564,4.064 68.58,3.048 ADCL.8@68.58,2.54
  Bottom Layer w0.203: v1(46.634,13.513) 46.939,13.208 46.939,11.989 47.549,11.379 47.549,9.55 48.057,9.042 48.057,7.315 v1(48.565,6.807)
AD8: ADCH.1 U1.88 | length 37.5
  Top Layer w0.203: U1.88@47.645,15.235 47.645,16.555 v1(47.65,16.662) ; v1(50.19,7.823) 50.292,7.722 56.286,7.722 57.302,6.706 59.233,6.706 59.639,6.299 61.163,6.299 61.773,6.909 62.281,6.909 64.719,4.47 71.73,4.47 ADCH.1@73.66,2.54
  Bottom Layer w0.203: v1(47.65,16.662) 47.65,14.427 48.463,13.614 48.463,13.106 48.768,12.802 48.768,10.16 50.19,8.738 v1(50.19,7.823)
AD9: ADCH.2 U1.89 | length 40.4
  Top Layer w0.203: v1@47.633,13.31 v1@47.734,13.394 ; v1(47.65,13.31) v1@47.734,13.394 ; U1.89@48.145,15.235 48.158,15.037 48.158,13.851 48.141,13.8 v1@47.734,13.394 ; v1(49.174,8.23) 49.479,8.534 50.495,8.534 50.902,8.128 56.49,8.128 57.506,7.112 61.366,7.112 64.618,10.465 67.259,10.465 72.949,4.775 73.965,4.775 ADCH.2@76.2,2.54
  Bottom Layer w0.203: v1(47.65,13.31) 48.362,12.598 48.362,9.957 49.174,9.144 v1(49.174,8.23)
AD10: ADCH.3 U1.90 | length 39.6
  Top Layer w0.203: U1.90@48.645,15.235 48.65,15.24 48.666,15.24 48.666,14.326 49.378,13.614 v1(49.581,13.614) ; v1(61.468,8.534) 63.906,10.871 67.462,10.871 73.152,5.182 76.098,5.182 ADCH.3@78.74,2.54
  Bottom Layer w0.203: v1(49.581,13.614) 49.581,10.566 50.597,9.55 52.73,9.55 52.832,9.449 60.554,9.449 v1(61.468,8.534)
AD11(TXD3): ADCH.4 U1.91 | length 48.3
  Top Layer w0.203: v1(48.463,17.374) 49.124,16.713 49.124,15.291 U1.91@49.145,15.235 ; v1(57.912,7.823) 59.741,7.823 63.195,11.278 67.666,11.278 73.355,5.588 76.302,5.588 77.826,4.064 79.756,4.064 ADCH.4@81.28,2.54
  Bottom Layer w0.203: v1(48.463,17.374) 48.463,14.529 48.87,14.122 48.87,13.31 49.174,13.005 49.174,10.363 50.394,9.144 52.527,9.144 52.73,8.941 57.506,8.941 57.912,8.534 v1(57.912,7.823)
AD14(RXD3): U1.92 XIO.33 | length 62.6
  Top Layer w0.203: v1(48.463,18.39) 49.645,17.209 U1.92@49.645,15.235 ; v1(50.902,10.262) 51.816,9.347 59.436,9.347 62.586,12.497 68.275,12.497 73.965,6.807 77.318,6.807 78.842,5.283 85.852,5.283 90.729,10.16 XIO.33@93.98,10.16
  Bottom Layer w0.203: v1(48.463,18.39) 49.632,17.221 49.632,15.494 50.292,14.834 50.292,10.82 v1(50.902,10.262)
AREF: BR1.1 PWMH.8 | length 44.1
  Top Layer w0.305: v1(27.127,23.571) 27.94,22.758 BR1.1@27.94,21.529
  Bottom Layer w0.254: PWMH.8@23.876,50.8 23.876,42.774 25.4,41.25 25.4,33.426 22.657,30.683 21.336,30.683 20.625,31.394 18.085,31.394 17.678,30.988 17.678,27.838 18.288,27.229 21.031,27.229 22.454,25.806 24.892,25.806 v1(27.127,23.571)
AVREF: C19.2 L3.2 U1.75 | length 11.5
  Top Layer w0.203: C19.2@40.843,12.738 41.046,12.802 C19.2@41.145,12.9
  Top Layer w0.279: C19.2@41.145,12.9 U1.75@41.145,15.235
  Top Layer w0.305: L3.2@32.901,12.09 33.63,12.09 35.052,13.513 37.897,13.513 38.672,12.738 C19.2@40.843,12.738
BD+: J3.P3 R20.2 Z4.2 | length 11.8
  Top Layer w0.254: J3.P3@4.089,22.225 4.115,22.25 5.385,22.25 5.893,21.742 Z4.2@5.893,21.726 5.994,22.031 6.909,22.047 9.855,24.994 11.379,24.994 11.582,25.197 13.879,25.197 R20.2@14.084,25.095
BD-: J3.P2 R19.2 Z3.2 | length 12.5
  Top Layer w0.254: J3.P2@4.089,22.885 5.801,22.885 Z3.2@6.604,23.689 6.518,23.994 6.534,23.978 7.214,23.978 9.144,25.908 10.363,25.908 v1(10.566,26.111) ; v1(12.903,24.079) 13.411,24.079 13.513,23.978 R19.2@14.084,23.978
  Bottom Layer w0.254: v1(10.566,26.111) 12.598,24.079 v1(12.903,24.079)
BOOST: C42.1 D3.C IC2.1 | length 4.2
  Top Layer w0.406: D3.C@78.943,15.47 79.478,15.775 79.756,16.053 C42.1@81.204,16.053 80.943,15.893 IC2.1@80.943,14.463
CANRX0: ADCH.7 U1.24 | length 76.1
  Top Layer w0.203: v1(45.72,35.154) 46.126,35.56 46.126,36.779 U1.24@46.145,36.835 ; v1(47.244,30.582) 47.955,31.293 49.987,31.293 50.495,31.801 52.629,31.801 53.035,32.207 v1(54.458,32.207) ; v1(59.436,14.63) 60.147,14.63 62.89,17.374 68.885,17.374 75.794,10.465 84.836,10.465 v1(85.446,11.074)
  Bottom Layer w0.203: v1(45.72,35.154) 45.72,32.106 v1(47.244,30.582) ; v1(54.458,32.207) 54.458,30.378 53.95,29.87 53.95,25.705 54.153,25.502 54.153,22.352 57.201,19.304 57.201,18.288 58.522,16.967 58.522,15.545 v1(59.436,14.63) ; v1(85.446,11.074) 86.868,11.074 88.9,9.042 ADCH.7@88.9,2.54
CANTX0: ADCH.8 U1.23 | length 76.7
  Top Layer w0.203: U1.23@46.645,36.835 46.634,36.835 46.634,35.357 v1(46.838,35.154) ; v1(48.362,30.582) 49.886,30.582 50.698,31.394 52.832,31.394 53.238,31.801 53.848,31.801 54.153,31.496 55.169,31.496 v1(55.474,31.801) ; v1(59.436,15.646) 60.046,16.256 61.062,16.256 62.586,17.78 69.088,17.78 75.997,10.871 84.125,10.871 85.242,11.989 v1(86.258,11.989)
  Bottom Layer w0.203: v1(46.838,35.154) 46.838,32.106 v1(48.362,30.582) ; v1(55.474,31.801) 55.474,30.785 54.356,29.667 54.356,25.908 54.559,25.705 54.559,22.555 57.607,19.507 57.607,18.491 58.928,17.17 58.928,16.053 v1(59.436,15.646) ; v1(86.258,11.989) 87.071,11.989 89.611,9.347 89.611,6.299 91.44,4.47 ADCH.8@91.44,2.54
CANTX1/IO: U1.140 XIO.34 | length 78.9
  Top Layer w0.203: U1.140@59.695,32.785 60.522,32.785 v1(62.281,34.544) ; v1(61.671,42.367) 62.179,42.367 63.5,41.046 65.634,41.046 65.837,40.843 75.59,40.843 76.2,41.453 79.858,41.453 80.264,41.859 82.296,41.859 82.804,42.367 83.922,42.367 84.836,41.453 v1(86.868,41.453) ; v1(91.237,8.941) 95.301,8.941 XIO.34@96.52,10.16
  Bottom Layer w0.203: v1(61.671,42.367) 61.671,40.742 62.179,40.234 62.179,37.998 61.57,37.389 61.57,35.763 62.281,35.052 v1(62.281,34.544) ; v1(86.868,41.453) 86.868,35.357 89.306,32.918 89.306,20.523 90.221,19.71 91.237,18.694 v1(91.237,8.941)
CMP: C31.2 IC1.5 Q2.3 RN4.3 RN4.4 | length 14.4
  Top Layer w0.203: IC1.5@17.069,28.905 IC1.5@17.243,28.914 ; Q2.3@24.181,26.619 Q2.3@24.3,26.67
  Top Layer w0.305: IC1.5@17.069,28.905 18.237,28.905 v1(18.491,29.159) 17.917,29.733 C31.2@18.123,30.505 ; RN4.3@24.014,30.08 RN4.4@24.014,29.28 24.014,29.275 24.028,26.619 Q2.3@24.74,26.619
  Top Layer w0.406: v1(22.962,26.619) 24.028,26.619 Q2.3@24.181,26.619
  Bottom Layer w0.305: v1(18.491,29.159) 19.507,29.159 19.914,29.185 22.479,26.619 v1(22.962,26.619)